# Altium PCB PCB_THR.PcbDoc
Units mm, origin at the board's own origin, x right, y up, seen from the top; angles counter-clockwise.
Board outline 90 x 70 mm, 2 copper layers (Top Layer, Bottom Layer); 27 components, 15 nets, 149 pads, 0 vias.
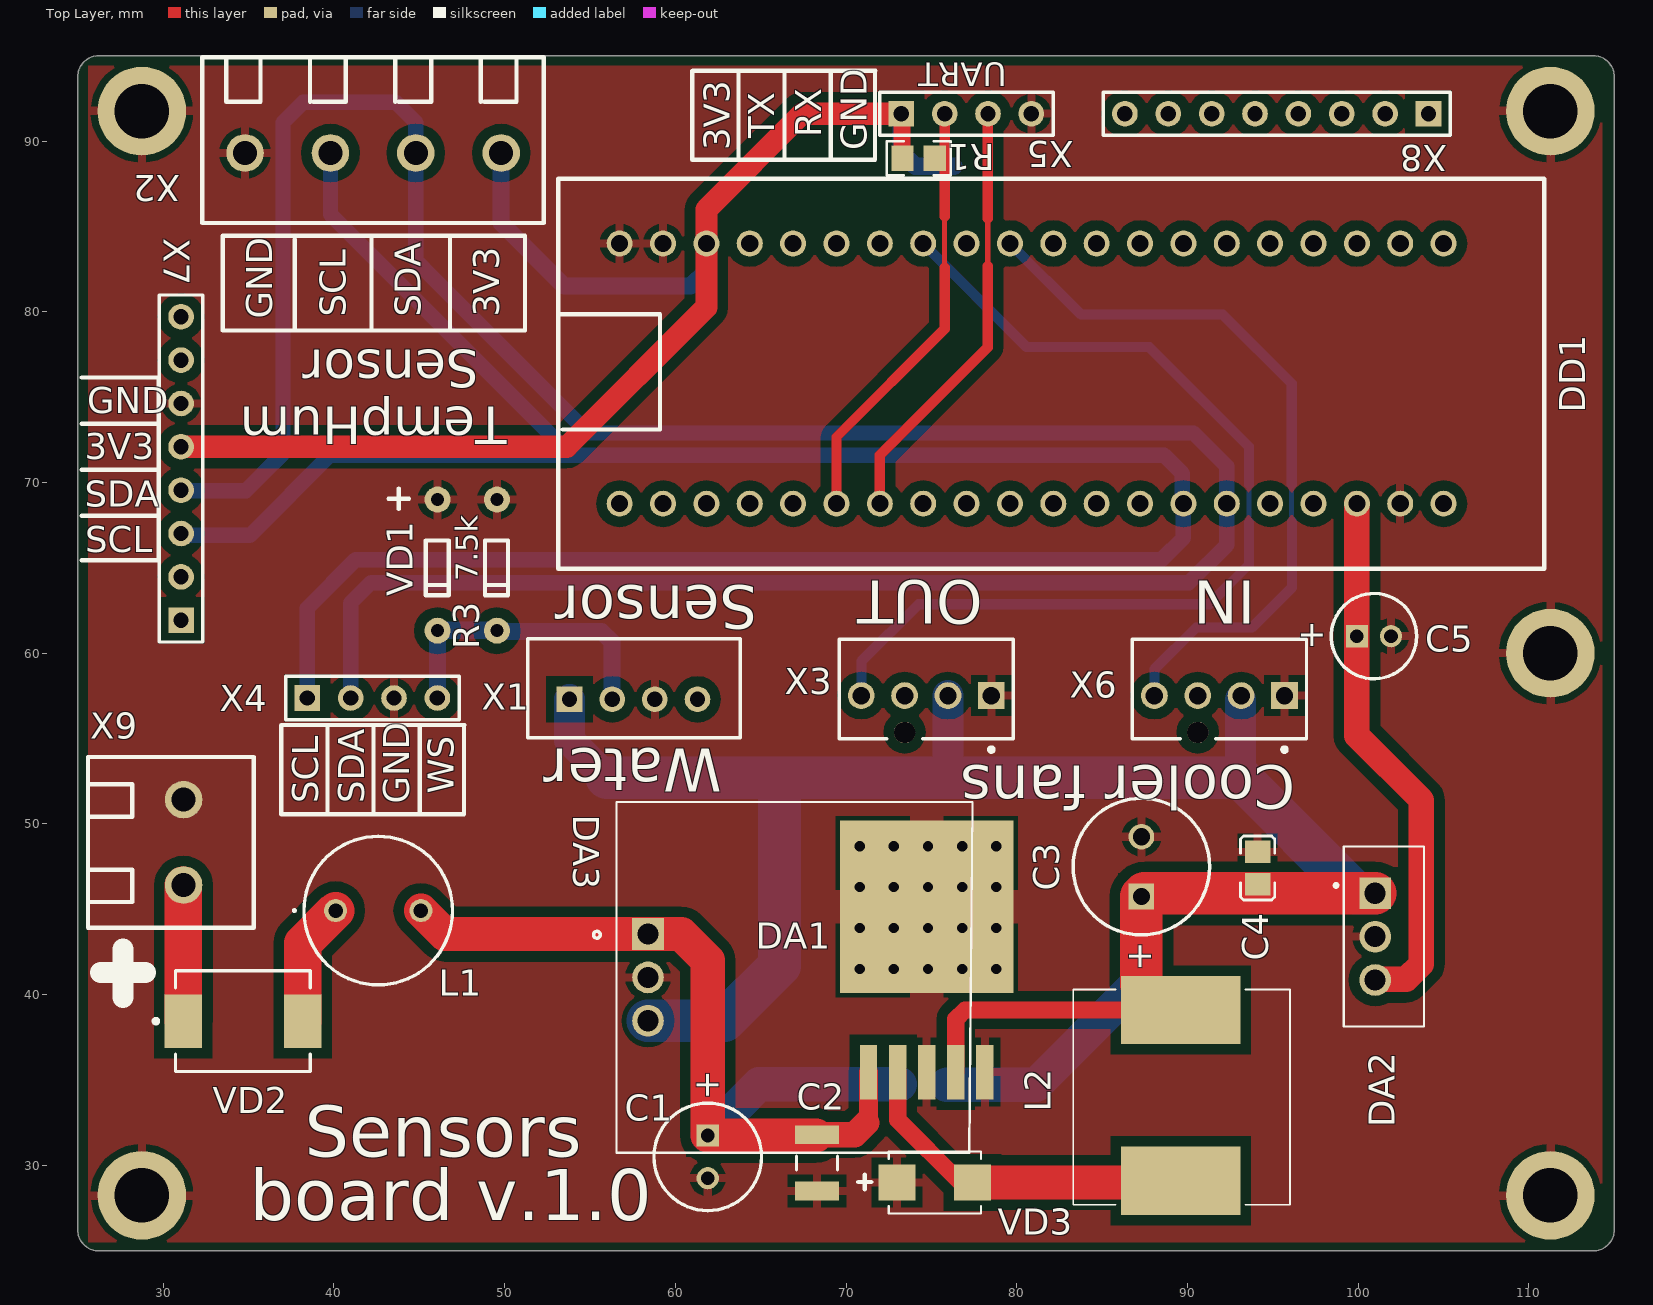
[diagram p0: Top Layer view]
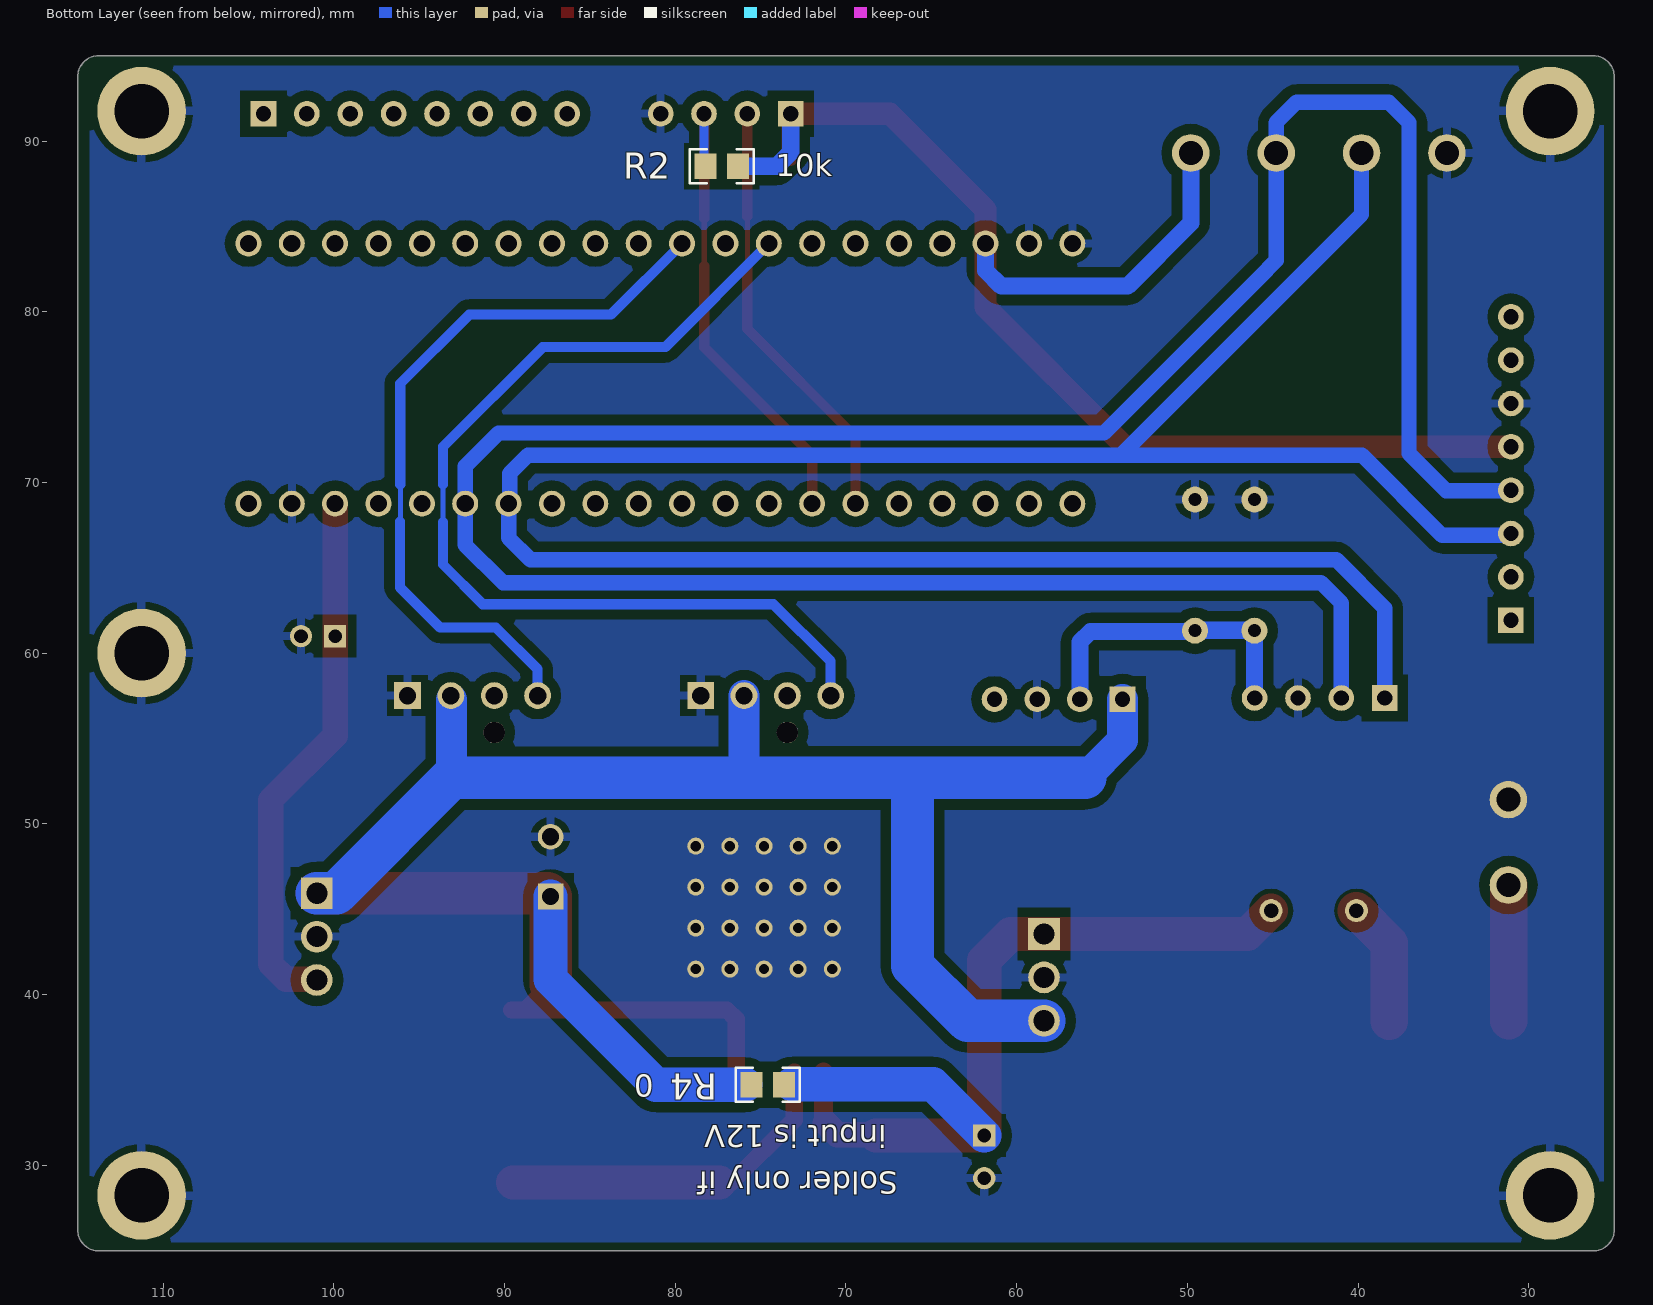
[diagram p1: Bottom Layer view, seen from below]

## Layer stack, top to bottom
Top Solder: solder mask 0.0102, Solder Resist, Dk 3.5
Top Layer: signal copper 0.0356
Dielectric 1: dielectric 0.32, FR-4, Dk 4.8
Bottom Layer: signal copper 0.0356
Bottom Solder: solder mask 0.0102, Solder Resist, Dk 3.5

## Board outline
26.225,24.997 cw(c26.225,26.225) 24.997,26.225 25,26.225 25,93.775 25,93.77 cw(c26.228,93.77) 26.228,94.998 26.228,94.995 113.775,94.995 113.77,94.998 cw(c113.77,93.77) 114.998,93.77 114.995,93.775 114.995,45.762 114.995,26.225 114.998,26.225 cw(c113.77,26.225) 113.77,24.997 113.775,25 48.419,25

## Design rules (kind name [scope] priority, off if disabled: settings)
Clearance ClearanceGNDPoly [InPolygon] p1: gap=0.6 ignorepadtopadclearanceinfootprint=FALSE
Clearance [All] p2: gap=0.254 ignorepadtopadclearanceinfootprint=FALSE except(0: Arc-Hole Track-Hole SMDPad-Hole THPad-Hole Via-Hole Fill-Hole Poly-Hole Region-Hole Text-Hole)
PolygonConnect GNDConnect [InPadClass('GNDPad')] p1: connectstyle=Relief reliefconductorwidth=2 reliefentries=4 polygonreliefangle="90 Angle" airgapwidth=0.254
PolygonConnect [All] p2: connectstyle=Relief reliefconductorwidth=0.5 reliefentries=4 polygonreliefangle="90 Angle" airgapwidth=0.4
RoutingVias [All] p1: holewidth=0.711 width=1.27 viastyle="Through Hole" minholewidth=0.2 minwidth=0.4 maxholewidth=10.711 maxwidth=10.27
SolderMaskExpansion [All] p1: expansion=0.102
Width [All] p1: maxlimit=20.254 minlimit=0.254 preferedwidth=0.254
30 further rules are at their usual default settings.

## Classes and differential pairs
pad class GNDPad: DA1-6 X9-2

## Components (designator, comment, footprint, x,y, rotation, side; value= is the part's Value field where it differs from the comment)
C1 "K50-35 63V 47uF" "K50-35 6.3x11x2.5" 61.9,30.5 r90 top
C2 "1210 1uF X7R 100V" C_SMD1210 68.3,30.15 r90 top
C3 "K50-35 35V 220uF" "K50-35 8x11.5x3.5" 87.3,47.5 r270 top
C4 "0805 1uF 25V X7R" C_SMD0805 94.104,47.42 r270 top
C5 "K50-35 1uF" "K50-35 5x11x2" 100.92,61 r180 top
DA1 "LM2596HV - 12V" "TO263-5 - heatsink" 74.8,44.675 r0 top
DA2 "КР142ЕН5А" TO-220-short 101.5,43.4 r270 top
DA3 "RDC1-0014" RDC1-0014 58.91,41.01 r270 top
DD1 "STM32F103_BLUEPILL" STM32F103_BLUEPILL 105,84 r90 top
L1 "RLB0914-470KL" RLB0914 42.6,44.925 r0 top
L2 "SRR1208-330YL" SRR1208 89.6,34.1 r90 top
R1 "0805 10k" R_SMD0805 74.25,89 r0 top
R2 "0805 10k" R_SMD0805 77.275,88.525 r0 bottom
R3 "7.5k 1%" THROU_HOLE2.54 49.55,69 r270 top
R4 "0805 0" R_SMD0805 74.575,34.725 r180 bottom
VD1 "BZX55C3V3" THROU_HOLE2.54 46.075,69 r270 top
VD2 "SS36" "DO214AB SMC" 34.675,38.45 r0 top
VD3 "SS26T3G" DO-214AA 75.2,29 r0 top
X1 "DS1069-4M" "DS1069-4 CWF-4 CONNFLY" 53.8,57.3 r0 top
X2 "300-041-12" 300-041-12 34.8,89.3 r0 top
X3 "Conn_Molex_47053-1000_eec" Molex_47053-1000_0 74.7,57.9 r90 top
X4 "DS1021_1x4" PLD1X4 38.445,57.375 r0 top
X5 "DS1021_1x4" PLD1X4 73.235,91.6 r0 top
X6 "" Molex_47053-1000_0 91.87,57.9 r90 top
X7 "DS1021_1x8" PLD1x8 31.05,61.93 r90 top
X8 "DS1021_1x8" PLD1x8 104.115,91.6 r180 top
X9 "300-021-12" 300-021-12 31.2,46.425 r90 top

## Footprints (in the part's own frame and the unit in brackets; to place one, negate y for a bottom-side part, rotate by r counter-clockwise, add the part's x,y. Pads: shape width x height; smd on the part's side, far side on the other; paste and mask are expansions set on the pad)
300-021-12 [mm] "klemmnik 2"
  round 2.2 hole 1.4: 1(0,0) 2(5,0)
  silkscreen extent -2.5,-4.1 7.5,5.6, body extent -2.7,-3.9 7.8,5.1, height 12.5
300-041-12 [mm] "klemmnik 2"
  round 2.2 hole 1.4: 1(15,0) 2(10,0) 3(5,0) 4(0,0)
  silkscreen extent -2.5,-4.1 17.5,5.6, body extent -2.4,-3.9 17.9,5.1, height 12.5
C_SMD0805 [mm]
  rect 1.3x1.5 smd: 1(-0.95,0) 2(0.95,0)
  silkscreen extent -1.87,-1 1.88,1, body extent -1.05,-0.67 1.05,0.68, height 0.75
C_SMD1210 [mm]
  rect 1.1x2.6 smd: 1(-1.65,0) 2(1.65,0)
  silkscreen extent -0.4,-1.2 0.4,1.2, body extent -1.75,-1.35 1.75,1.35, height 1.45
"DO214AB SMC" [mm]
  rect 2.2x3.15 smd: 1(-3.5,0) 2(3.5,0)
  silkscreen extent -5.22,-2.95 3.95,2.95, body extent -4.06,-3.15 4.06,3.15, height 2.62
DO-214AA [mm] "DO-214AA"
  rect 2.18x2.12 smd: 1(2.215,0) 2(-2.215,0)
  silkscreen extent -4.48,-1.81 2.7,1.81, body extent -2.75,-1.95 2.75,1.95, height 2.45
"DS1069-4 CWF-4 CONNFLY" [mm]
  rect 1.5x1.5 hole 0.9: 1(0,0)
  round 1.5 hole 0.9: 2(2.5,0) 3(5,0) 4(7.5,0)
  silkscreen extent -2.45,-2.25 10,3.55, body extent -2.5,-2.25 10,3.5, height 7
"K50-35 5x11x2" [mm]
  rect 1.3x1.3 hole 0.8: 1(1,0)
  round 1.3 hole 0.8: 2(-1,0)
  silkscreen extent -2.5,-2.5 2.5,2.5, body extent -2.53,-2.53 2.53,2.53, height 11.53
"K50-35 6.3x11x2.5" [mm]
  rect 1.3x1.3 hole 0.8: 1(1.25,0)
  round 1.3 hole 0.8: 2(-1.25,0)
  silkscreen extent -3.15,-3.15 3.15,3.15, body extent -3.18,-3.18 3.18,3.18, height 11.53
"K50-35 8x11.5x3.5" [mm]
  rect 1.5x1.5 hole 1: 1(1.75,0)
  round 1.5 hole 1: 2(-1.75,0)
  silkscreen extent -4,-4 4,4, body extent -4.03,-4 4.03,4.05, height 12.03
Molex_47053-1000_0 [mm]
  rect 1.57x1.57 hole 1.02 paste-1000 mask+0: 1(-0.38,-3.81)
  round 1.57 hole 1.02 paste-1000 mask+0: 2(-0.38,-1.27) 3(-0.38,1.27) 4(-0.38,3.81)
  round 1.25 hole 1.25 unplated paste-1000 mask+0: ""(-2.54,1.27)
  silkscreen extent -3.67,-5.1 2.92,5.1, body extent -3.26,-5.3 3.02,5.3, height 0.25
PLD1X4 [mm]
  rect 1.5x1.5 hole 0.9: 1(0,0)
  round 1.5 hole 0.9: 2(2.54,0) 3(5.08,0) 4(7.62,0)
  silkscreen extent -1.27,-1.27 8.89,1.27, body extent -1.28,-1.27 8.88,1.27, height 8.6
PLD1x8 [mm]
  rect 1.5x1.5 hole 0.9: 1(0,0)
  round 1.5 hole 0.9: 2(2.54,0) 3(5.08,0) 4(7.62,0) 5(10.16,0) 6(12.7,0) 7(15.24,0) 8(17.78,0)
  silkscreen extent -1.27,-1.27 19.05,1.27, body extent -1.28,-1.27 19.04,1.27, height 8.6
R_SMD0805 [mm]
  rect 1.3x1.5 smd: 1(-0.95,0) 2(0.95,0)
  silkscreen extent -1.88,-1 1.88,1, body extent -0.97,-0.6 1.03,0.65, height 0.55
RDC1-0014 [mm] "DC-DC BUCK 60V"
  rect 1.86x1.86 hole 1.24: 1(-2.54,-0.51)
  round 1.86 hole 1.24: 2(0,-0.51) 3(2.54,-0.51)
  silkscreen extent -10.27,-3.7 10.27,18.5
RLB0914 [mm]
  round 1.35 hole 0.85: 1(-2.5,0) 2(2.5,0)
  silkscreen extent -4.96,-4.35 4.35,4.35, body extent -4.35,-4.35 4.35,4.35, height 12
SRR1208 [mm]
  rect 4x7 smd: 1(-5,0) 2(5,0)
  silkscreen extent -6.4,-6.4 6.2,6.3, body extent -6.55,-6.45 6.35,6.45, height 8.5
STM32F103_BLUEPILL [mil] "STM32F103_BLUEPILL"
  round 60 hole 39.37: 1(0,0) 2(0,100) 3(0,200) 4(0,300) 7(0,1600) 10(0,400) 11(0,500) 12(0,600) 13(0,700) 14(0,800) 15(0,900) 16(0,1000) 17(0,1100) 18(0,1200) 19(0,1300) 21(0,1400) 22(0,1500) 25(-600,1900) 26(-600,1800) 27(-600,1700) 28(-600,1600) 29(-600,1500) 30(-600,1400) 31(-600,1300) 32(-600,1200) 33(-600,1100) 38(-600,1000) 39(-600,900) 40(-600,800) 41(-600,700) 42(-600,600) 43(-600,500) 45(-600,400) 46(-600,300) 58(0,1700) 59(0,1800) 60(0,1900) 61(-600,100) 62(-600,200) 63(-600,0)
  silkscreen extent -750,-232 150,2041, body extent -751,-232 149,2034, height 503
THROU_HOLE2.54 [mil]
  round 60 hole 30: 1(0,0) 2(302.36,0)
  silkscreen extent 94,-28 220,26
"TO263-5 - heatsink" [mm]
  rect 1.016x3.2 smd: 1(-3.481,-9.211) 2(-1.779,-9.211) 3(-0.077,-9.211) 4(1.625,-9.211) 5(3.327,-9.211)
  round 1 hole 0.6: 6(-4,-3.175) 6(-4,-0.775) 6(-4,1.625) 6(-4,4.025) 6(-2,-3.175) 6(-2,-0.775) 6(-2,1.625) 6(-2,4.025) 6(0,-3.175) 6(0,-0.775) 6(0,1.625) 6(0,4.025) 6(2,-3.175) 6(2,-0.775) 6(2,1.625) 6(2,4.025) 6(4,-3.175) 6(4,-0.775) 6(4,1.625) 6(4,4.025)
  rect 10.16x10.1 smd: 6(-0.077,0.483)
  body extent -5.01,-10.06 4.81,4.54, height 4.22
TO-220-short [mm]
  rect 1.86x1.86 hole 1.24: 1(-2.54,-0.51)
  round 1.86 hole 1.24: 2(0,-0.51) 3(2.54,-0.51)
  silkscreen extent -5.27,-2.9 5.27,2.35, body extent -5.94,-2.26 5.94,2.14, height 19.11

## Part data
C1 C3 C5: library part K50-35mini, "Конденсатор электролитический алюминиевый"
C2: library part C1210, "Cap SMD1210"
C4: library part C0805, "SMD Cap 0805"
DA1: library part LM2596HV, "SIMPLE SWITCHER4; 4V to 60V, 3A Low Component Count Step-Down Regulator"
DA2: "Cтабилизатор напряжения положительной полярности с выходным / напряжением 5 В"
DA3: "Встраиваемый DC/DC преобразователь 60В 3А"
L1: library part RLB0914, "Радиальные выводные индуктивности / Диапазон рабочих температур –20 °С… +80 °С. / Рост температуры в процессе эксплуатации, не более 20 °С. / Диапазон индуктивностей 1 - 82000 мкГ"
L2: library part SRR1208-682KL, "Fixed Inductors 6800uH 10% SMD 1208"
R1 R2 R4: library part R0805, "SMD Res 0805"
R3: library part RES_THROUHOLE, "Throu hole resistor"
VD1: "Stabilitron 3.3V"
VD2: "Rectifier, Schottky; DO-214AB; 3.0A IF; 0.75V; 60V; 100A IFRM; 10000V/us; 1000pF"
VD3: "Диод Шоттки 2А 60В [SMB / DO-214AA]"
X1: library part DS1069-4, "Вилка на плату 2.50мм"
X2: "Клеммник винтовой, 4-контактный, 5мм, прямой"
X3: "CONN 4 Positions Header, Unshrouded Connector 0.100\" (2.54mm) Through Hole Tin", Current=4.0A, Digikey Part Number=WM4330-ND, Manufacturer=Molex, Mouser Part Number=538-47053-1000, Package=CONN_4P254L, Part Number=47053-1000, Temperature="0°C to +75°C", Temperature Range High=+75°C, Temperature Range Low=0°C, Voltage=250V, ComponentLink1Description=Upverter, ComponentLink1URL=https://upverter.com/upn/revision/17f438354fec4bac/, ComponentLink2Description=Datasheet, ComponentLink2URL=http://www.molex.com/webdocs/datasheets/pdf/en-us//0470531000_PCB_HEADERS.pdf, Contact Type="Male Pin", Digikey Description="CONN 4 Positions Header, Unshrouded Connector 0.100\" (2.54mm) Through Hole Tin", helpURL=https://upverter.com/upn/revision/17f438354fec4bac/, Ipc Land Pattern Name=HDRV4W65P_1X4_1020X65X1350, Lead Free=yes, Mounting Style="Through Hole", Pitch=2.54mm, RoHS=TRUE, Supplier 1=Digi-Key, Supplier 2=Mouser, Supplier Part Number 1=WM4330-ND, Supplier Part Number 2=538-47053-1000
X4 X5: "Вилка штыревая 2.54мм 1x4 прямая тип1"
X6: library part 47053-1000, "CONN 4 Positions Header, Unshrouded Connector 0.100\" (2.54mm) Through Hole Tin", Current=4.0A, Digikey Part Number=WM4330-ND, Manufacturer=Molex, Mouser Part Number=538-47053-1000, Package=CONN_4P254L, Temperature="0°C to +75°C", Temperature Range High=+75°C, Temperature Range Low=0°C, Voltage=250V, ComponentLink1Description=Upverter, ComponentLink1URL=https://upverter.com/upn/revision/17f438354fec4bac/, ComponentLink2Description=Datasheet, ComponentLink2URL=http://www.molex.com/webdocs/datasheets/pdf/en-us//0470531000_PCB_HEADERS.pdf, Contact Type="Male Pin", Digikey Description="CONN 4 Positions Header, Unshrouded Connector 0.100\" (2.54mm) Through Hole Tin", helpURL=https://upverter.com/upn/revision/17f438354fec4bac/, Ipc Land Pattern Name=HDRV4W65P_1X4_1020X65X1350, Lead Free=yes, Mounting Style="Through Hole", Part Number=47053-1000, Pitch=2.54mm, RoHS=TRUE, Supplier 1=Digi-Key, Supplier 2=Mouser, Supplier Part Number 1=WM4330-ND, Supplier Part Number 2=538-47053-1000
X7 X8: "Вилка штыревая 2.54мм 1x8 прямая тип1"
X9: "Klemmnik 2"

## Free pads (board coordinates)
  round 5.2 hole 3.2: 1(28.75,28.25) 2(111.25,28.25) 4(111.25,60) 5(28.75,91.75) 5(111.25,91.75)

## Nets (pads, with @x,y where several pads share a name; then routed paths per layer and width w, separated by ;. In a path a pad name is that pad's centre, name@x,y a point inside that pad or via, vN(x,y) a via of type N, cw(c..) or ccw(c..) an arc to the next point about the centre after c; other vN are vias at no path point)
+3V3: DD1.58 R1.1 R2.1 X2.1 X5.1 X7.5 | length 81.5
  Top Layer w1: R1.1@73.268,89.032 X5.1@73.268,91.568
  Top Layer w1.3: X7.5 53.64,72.09 61.82,80.27 DD1.58 61.82,85.995 67.425,91.6 X5.1 X5.1@73.268,91.568
  Bottom Layer w1: X2.1 49.8,85.2 53.5,81.5 60.9,81.5 61.82,82.42 DD1.58 ; X5.1 73.235,89.35 74.06,88.525 R2.1 R2.1@76.3,88.5
+5V: C5.1 DA2.3 DD1.62 | length 31.7
  Top Layer w1.5: DD1.62 C5.1 99.92,55.18 103.7,51.4 103.7,41.8 102.8,40.9 101.03,40.9 DA2.3
  Bottom Layer w1: DD1.62@99.9,68.74 DD1.62
+12V: C3.1 C4.2 DA1.4 DA2.1 DA3.3 L2.2 R4.1 X1.1 X3.2 X6.2 | length 138.7
  Top Layer w1: DA1.4 76.425,38.564 76.961,39.1 L2.2@88.8,39.1 ; L2.2@87.3,40.6 L2.2@88.8,39.1 ; L2.2 L2.2@88.8,39.1
  Top Layer w2.5: L2.2@87.3,40.6 C3.1 87.484,45.934 DA2.1@100.99,45.934
  Bottom Layer w1: 75.97,52.755 76.025,52.7
  Bottom Layer w1.8: X1.1 53.8,54.9 56,52.7 ; 75.97,52.755 X3.2 ; 93.1,52.7 X6.2@93.1,57.295
  Bottom Layer w2: R4.1@75.9,34.725 81.125,34.725 87.3,40.9 C3.1
  Bottom Layer w2.5: 56,52.7 76.025,52.7 93.1,52.7 99.86,45.94 DA2.1 ; DA3.3 62.87,38.47 66.1,41.7 66.1,52.3
+48V: C1.1 C2.2 DA1.1 DA3.1 L1.2 R4.2 | length 53.3
  Top Layer w1.1: 71.2,32.5 71.319,32.619 DA1.1
  Top Layer w1.5: C2.2 70.5,31.8 71.2,32.5
  Top Layer w2: L1.2 46.475,43.55 DA3.1 60.35,43.55 61.9,42 C1.1 C2.2@68.25,31.75
  Bottom Layer w2: C1.1 64.9,34.75 R4.2@73.15,34.75
GND: C1.2 C2.1 C3.2 C4.1 C5.2 DA1.3 DA1.5 DA1.6 DA2.2 DA3.2 DD1.59 DD1.60 DD1.61 pad.1 pad.2 pad.4 pad.5 R3.1 VD1.1 VD3.2 X1.3 X2.4 X3.1 X4.3 X5.4 X6.1 X7.6 X9.2
IN: DD1.16 X6.4 | length 43.4
  Bottom Layer w0.3: 96.1,69.9 96.1,67.725 96.125,67.7
  Bottom Layer w0.6: DD1.16 83.767,79.833 92.067,79.833 96.1,75.8 96.1,69.9 ; X6.4 88.06,59.06 90.5,61.5 93.764,61.5 96.125,63.861 96.125,67.7
IN_48V: VD2.1 X9.1 | length 8
  Top Layer w2: VD2.1 VD2.1@31.188,38.463 ; X9.1@31.188,46.413 X9.1
  Top Layer w2.2: VD2.1@31.188,38.463 X9.1@31.188,46.413
NetDA1_2: DA1.2 L2.1 VD3.1 | length 20.9
  Top Layer w1: DA1.2 73.029,35.456 73.029,32.671 76.7,29 VD3.1 ; L2.1@89.5,29 L2.1
  Top Layer w2: VD3.1 L2.1@89.5,29
NetL1_1: L1.1 VD2.2 | length 7.3
  Top Layer w2.2: VD2.2 38.175,43 L1.1
OUT: DD1.18 X3.4 | length 58
  Bottom Layer w0.3: X3.4@70.9,57.52 X3.4@70.92,57.5 ; 93.6,67.675 93.6,69.9
  Bottom Layer w0.6: X3.4@70.9,57.52 70.9,59.525 74.25,62.875 91.275,62.875 93.6,65.2 93.6,67.675 ; DD1.18 80.587,77.933 87.767,77.933 93.6,72.1 93.6,69.9
RX: DD1.31 R2.2 X5.3 | length 28.6
  Top Layer w0.3: 78.3,82.675 78.3,85.475
  Top Layer w0.6: DD1.31 71.98,71.605 78.3,77.925 78.3,82.675 ; 78.3,85.475 78.3,91.585 X5.3
  Bottom Layer w0.3: R2.2 R2.2@78.315,88.615
  Bottom Layer w0.5: R2.2@78.315,88.615 X5.3
SCL: DD1.42 X2.3 X4.1 X7.3 | length 147
  Bottom Layer w0.9: X7.3@30.897,67.163 X7.3 31.16,66.9 35.075,66.9 39.775,71.6 53.9,71.6 ; X4.1@38.375,57.445 X4.1 38.445,62.645 41.275,65.475 88.475,65.475 89.76,66.76 DD1.42 ; X2.3 39.8,85.7 53.9,71.6 ; DD1.42@89.7,68.76 89.7,70.525 88.625,71.6 53.9,71.6
SDA: DD1.43 X2.2 X4.2 X7.4 | length 158.5
  Bottom Layer w0.9: X7.4 31.075,69.525 34.85,69.525 37.025,71.7 37.025,91.09 38.21,92.275 43.6,92.275 44.8,91.075 X2.2 44.8,83 45.82,81.98 54.9,72.9 90.35,72.9 92.3,70.95 DD1.43 92.3,66.35 90.087,64.137 42.187,64.137 40.985,62.935 X4.2
TX: DD1.30 R1.2 X5.2 | length 25.5
  Top Layer w0.3: 75.775,82.6 75.775,85.575
  Top Layer w0.6: DD1.30 69.44,72.665 75.775,79 75.775,82.6 ; 75.775,85.575 X5.2
WS: R3.2 VD1.2 X1.2 X4.4 | length 18
  Bottom Layer w1: X4.4@46.065,57.51 X4.4 46.07,57.38 46.07,61.365 46.075,61.37 46.1,61.345 49.525,61.345 R3.2 49.595,61.275 55.675,61.275 56.3,60.65 X1.2
pads on no net: DD1.1 DD1.2 DD1.3 DD1.4 DD1.7 DD1.10 DD1.11 DD1.12 DD1.13 DD1.14 DD1.15 DD1.17 DD1.19 DD1.21 DD1.22 DD1.25 DD1.26 DD1.27 DD1.28 DD1.29 DD1.32 DD1.33 DD1.38 DD1.39 DD1.40 DD1.41 DD1.45 DD1.46 DD1.63 X1.4 X3. X3.3 X6. X6.3 X7.1 X7.2 X7.7 X7.8 X8.1 X8.2 X8.3 X8.4 X8.5 X8.6 X8.7 X8.8

## Polygon pours and split planes (outlines as drawn)
GND on Top Layer "NONET_L01_P-001" (solid, remove dead copper, pour order 2): 25.6,94.4 114.3,94.4 114.3,25.5 25.6,25.5
GND on Bottom Layer "Bottom Layer-GND" (solid, remove dead copper, pour order 0): 25.6,94.4 25.6,25.5 114.3,25.5 114.3,94.4

## Silkscreen, mask and mechanical layers (free items; w line width, h text height)
Top Overlay:
  lines w0.254: 25.225,65.45 29.725,65.45 ; 25.225,68.05 29.625,68.05 ; 25.225,70.75 29.625,70.75 ; 25.225,73.45 29.725,73.45 ; 25.225,76.15 29.725,76.15 ; 29.75,65.425 29.75,76.125 ; 36.925,55.775 36.925,50.575 47.625,50.575 47.625,55.775 ; 36.95,55.8 47.65,55.8 ; 37.7,78.9 37.7,84.25 ; 39.625,50.675 39.625,55.775 ; 42.2,78.9 42.2,84.45 ; 42.325,50.575 42.325,55.675 ; 43.2,69.05 43.8,69.05 44.4,69.05 ; 43.8,68.45 43.8,69.65 ; 45.025,50.675 45.025,55.675 ; 46.8,79 46.8,84.35 ; 61,94.1 61,88.9 71.7,88.9 71.7,94.1 ; 61.025,94.125 71.725,94.125 ; 63.7,89 63.7,94.1 ; 66.4,88.9 66.4,94 ; 69.1,89 69.1,94 ; 33.5,78.9 33.5,84.45 51.2,84.45 51.2,78.9 33.5,78.9
  lines w1.254: 26.35,41.3 28.05,41.3 ; 27.65,39.85 27.65,41.55 ; 27.65,41.25 27.65,42.65 ; 27.75,41.3 28.95,41.3
  text "UART" at 79.425,94.6 h1.4 r180
  text "RX" at 68.55,90.225 h1.52 r90
  text "TX" at 65.8,90.175 h1.52 r90
  text "3V3" at 63.175,89.475 h1.52 r90
  text "GND" at 71.225,89.45 h1.52 r90
  text "SCL" at 40.7,79.7 h1.52 r90
  text "SDA" at 45.1,79.7 h1.52 r90
  text "3V3" at 49.7,79.7 h1.52 r90
  text "GND" at 36.4,79.6 h1.52 r90
  text "Sensor" at 48.5,77.775 h2.2 r180
  text "TempHum" at 50.125,74.45 h2.2 r180
  text "GND" at 25.55,74.05 h1.52
  text "3V3" at 25.4,71.35 h1.52
  text "SDA" at 25.4,68.575 h1.52
  text "SCL" at 25.425,65.925 h1.52
  text "OUT" at 78,64.25 h2.52 r180
  text "IN" at 93.975,64.25 h2.52 r180
  text "7.5k" at 48.425,64.225 h1.3 r90
  text "Sensor" at 64.8,63.95 h2.52 r180
  text "Water" at 62.725,54.4 h2.52 r180
  text "Cooler fans" at 96.3,53.4 h2.52 r180
  text "WS" at 47.025,51.775 h1.52 r90
  text "SDA" at 41.775,51.225 h1.52 r90
  text "SCL" at 39.1,51.2 h1.52 r90
  text "GND" at 44.425,51.175 h1.52 r90
  text "Sensors" at 38.305,30.52 h3
  text "board v.1.0" at 35.08,26.795 h3
Bottom Overlay:
  text "10k" at 74.1,87.95 h1.3
  text "0" at 82.4,35.325 h1.3 r180
  text "input is 12V" at 67.625,32.35 h1.3 r180
  text "Solder only if" at 66.975,29.625 h1.3 r180
Mechanical 4 (Mech4):
  lines w0.254: 24.997,26.225 ccw(c26.225,26.225) 26.225,24.997 ; 25,26.225 25,93.775 ; 25,93.77 cw(c26.228,93.77) 26.228,94.998 ; 26.225,25 48.419,25 113.775,25 ; 26.228,94.995 113.775,94.995 ; 113.77,24.997 ccw(c113.77,26.225) 114.998,26.225 ; 113.77,94.998 cw(c113.77,93.77) 114.998,93.77 ; 114.995,26.225 114.995,45.762 114.995,93.775

## Text inside footprints (layer, text, board x,y; h text height)
C1: Top Overlay "+" at 62.55,33.85 h1.5 r90
C3: Top Overlay "+" at 86.6,43.1 h1.5 r270
C5: Top Overlay "+" at 98.17,61.7 h1.5 r180
X2: Mechanical 1 "Front" at 49.9,94.2 h1.2 r180; Mechanical 1 "Front" at 39.9,94.2 h1.2 r180
X9: Mechanical 1 "Front" at 26.3,51.525 h1.2 r270